# EAGLE board MOL-v2-1_MOD-Strips (EAGLE 8.2.2)
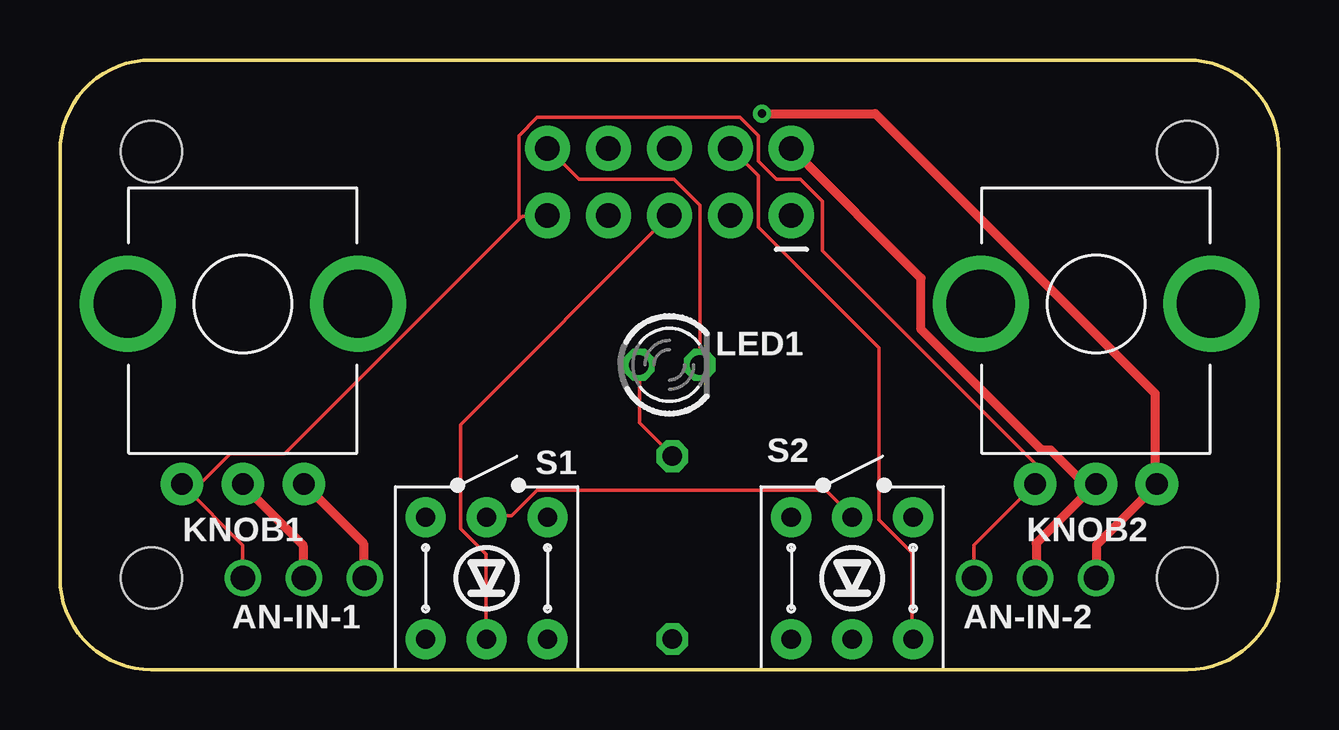
[diagram p0: board, top side]
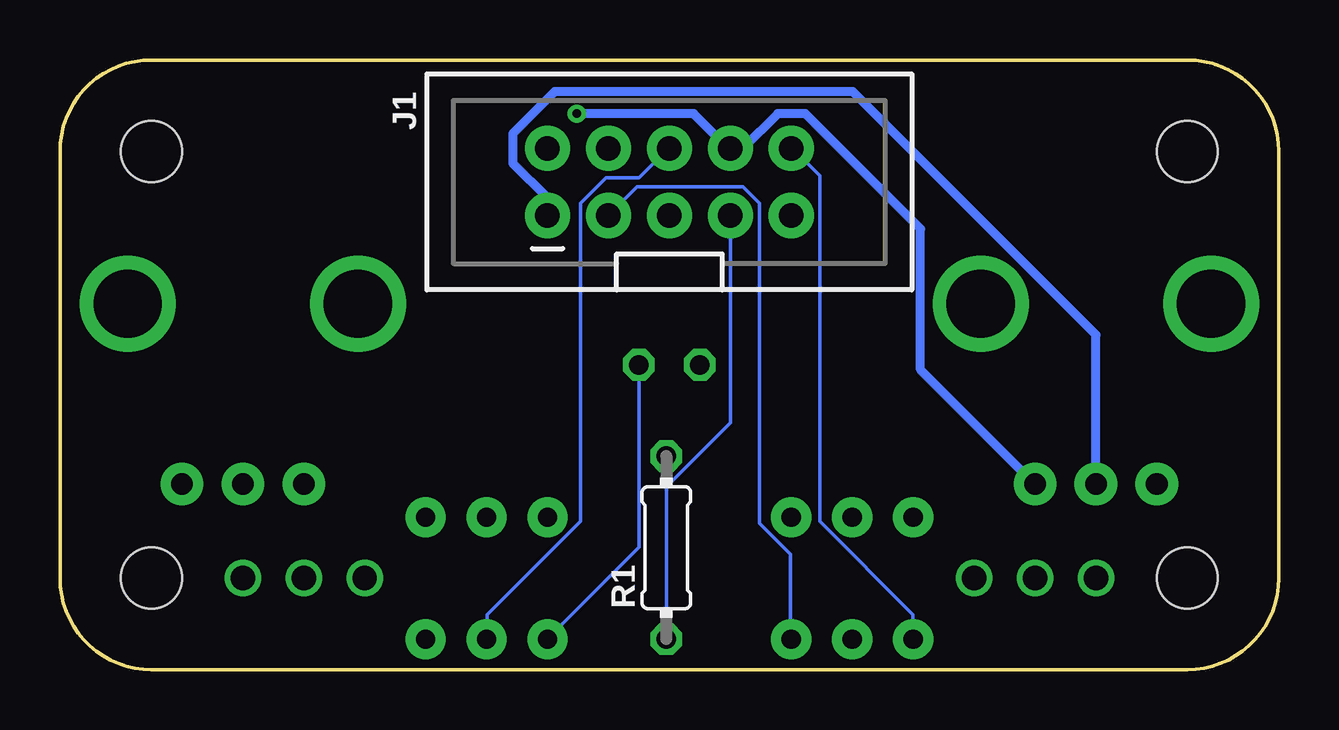
[diagram p1: board, bottom side, seen from below]

Size 50.8 x 25.4 mm. Coordinates in mm from the lower left corner, seen from the top.
Outline: 0,3.81 arc90 3.81,0 46.99,0 arc90 50.8,3.81 50.8,21.59 arc90 46.99,25.4 3.81,25.4 arc90 0,21.59 0,3.81
Copper layers (1*16): Top 0.035mm / dielectric 1.5mm / Bottom 0.035mm
Design rules "default": minimum track width 6mil, minimum drill 0.35mm, track to track 6mil, track to pad 6mil, pad to pad 6mil, via to via 6mil, smd to smd 6mil, copper to edge 40mil, drill to drill 6mil, minimum pad ring 10mil, minimum via ring 8mil, stop-mask expansion 4mil, vias tented up to drill 0mil, thermal gap 10mil
Net classes: 3 Analog Sig: width 0.381 mm, clearance 0.279 mm
Holes 2.54 mm at 3.81,3.81 46.99,3.81 3.81,21.59 46.99,21.59

## Footprints (pad centres in the part's own frame; a part is rotated, then mirrored left to right if it is on the bottom)
1X03_NO_SILK = drill 1.016 pad 1.524: 1 0,0; 2 2.54,0; 3 5.08,0
2X5-SHROUDED_LOCK = drill 1.016 pad 1.88: 1 -1.397,5.08; 2 1.397,5.08; 3 -1.397,2.54; 4 1.397,2.54; 5 -1.397,0; 6 1.397,0; 7 -1.397,-2.54; 8 1.397,-2.54; 9 -1.397,-5.08; 10 1.397,-5.08
TRIM-PCB-9MM = drill 0.9 pad 1.778: 1 -2.54,-7.5; 2 0,-7.5; 3 2.54,-7.5 | drill 2.845 pad 4: 5 -4.8,0; M2 4.8,0
LED3MM = drill 0.813 octagon: A -1.27,0; K 1.27,0
0204/7 = drill 0.813 octagon: 1 -3.81,0; 2 3.81,0
TR2-SWITCH-MOMENTARY-LED = drill 0.8 pad 1.676: 1 2.54,-2.54; 2 2.54,2.54; 3 -2.54,-2.54; 4 -2.54,2.54; A 0,2.54; C 0,-2.54

## Placement (x,y rotation side)
AN-IN-1  [1X03_NO_SILK]  7.62,3.81 0 top
AN-IN-2  [1X03_NO_SILK]  38.1,3.81 0 top
J1  [2X5-SHROUDED_LOCK]  25.4,20.32 90 bottom
KNOB1  [TRIM-PCB-9MM]  7.62,15.24 0 top
KNOB2  [TRIM-PCB-9MM]  43.18,15.24 0 top
LED1  [LED3MM]  25.4,12.7 0 top
R1  220  [0204/7]  25.53,5.08 90 bottom
S1  SW-LEDPTH  [TR2-SWITCH-MOMENTARY-LED]  17.78,3.81 0 top
S2  SW-LEDPTH  [TR2-SWITCH-MOMENTARY-LED]  33.02,3.81 0 top

## Library data of the parts
AN-IN-1 AN-IN-2 = SparkFun-Connectors
J1 = SparkFun-Connectors; PROD_ID: CONN-08671; SF_ID: PRT-08506
KNOB1 KNOB2 S1 S2 = Daniel
LED1 = led
R1 = CMU-ArtFab

## Nets
+3V3: AN-IN-1.1 AN-IN-2.1 J1.9 KNOB1.1 KNOB2.1
AGND [Analog Sig]: AN-IN-1.3 AN-IN-2.3 J1.8 KNOB1.3 KNOB2.3
AN1 [Analog Sig]: AN-IN-1.2 J1.1 KNOB1.2
AN2 [Analog Sig]: AN-IN-2.2 J1.2 KNOB2.2
B1: J1.3 S1.1
B2: J1.4 S2.1
GND: J1.10 LED1.K S1.3 S2.3
LED1: J1.7 R1.1
N1: LED1.A R1.2
PWM_1: J1.5 S1.C
PWM_2: J1.6 S2.C
V+: S1.A S2.A

## Tracks (layer width: path | path; a pad name or v marks a point on that pad's centre or on a via)
+3V3
  Top 0.152: AN-IN-2.1 38.1,5.18 40.62,7.7 KNOB2.1 40.62,7.77 40.62,8.61 31.77,17.45 31.77,19.51 30.86,20.42 29.87,20.42 29.11,21.18 29.11,22.25 28.35,23.01 19.89,23.01 19.13,22.25 19.13,18.82 19.16,18.78 | AN-IN-1.1 7.62,5.18 5.11,7.7 KNOB1.1 5.49,7.39 7.09,8.99 9.37,8.99 19.16,18.78 | 19.16,18.78 19.28,18.9 20.27,18.9 J1.9
AGND  (via drill 0.35)
  Top 0.381: AN-IN-2.3 43.2,3.81 43.2,5.18 45.72,7.7 KNOB2.3 45.64,7.92 45.64,11.51 33.98,23.16 v29.26,23.16 | AN-IN-1.3 12.65,3.81 12.65,5.26 10.21,7.7 KNOB1.3
  Bottom 0.381: KNOB1.3 10.21,7.77 14.94,12.5 14.94,18.36 19.74,23.16 20.88,23.16 22.33,21.72 J1.8 23.01,21.79 24.38,23.16 v29.26,23.16
AN1
  Top 0.381: AN-IN-1.2 10.13,3.81 10.13,5.18 7.62,7.7 KNOB1.2
  Bottom 0.381: J1.1 30.48,19.66 31.93,21.11 31.93,22.33 30.18,24.08 17.75,24.08 7.62,13.95 KNOB1.2
AN2
  Top 0.381: AN-IN-2.2 40.69,3.81 40.69,5.26 43.13,7.7 KNOB2.2 42.82,7.62 41.3,9.14 40.92,9.14 35.89,14.17 35.89,16.31 J1.2
B1
  Bottom 0.152: J1.3 26.75,20.12 22.33,20.12 21.64,19.43 21.64,6.1 20.34,4.8 20.34,1.29 S1.1
B2
  Top 0.152: S2.1 35.51,1.29 35.51,4.88 34.14,6.25 34.14,13.41 29.11,18.44 29.11,20.57 27.96,21.72 J1.4
GND
  Top 0.152: LED1.K 26.67,19.36 25.6,20.42 21.64,20.42 20.34,21.72 J1.10
  Bottom 0.152: LED1.K 26.67,5.11 30.48,1.29 S2.3 | S1.3 15.24,2.29 19.13,6.17 19.13,20.57 20.27,21.72 J1.10
LED1
  Bottom 0.152: R1.1 25.53,7.62 22.86,10.29 J1.7
N1
  Top 0.152: LED1.A 24.16,12.65 24.16,10.29 25.53,8.91 R1.2
PWM_1
  Top 0.152: J1.5 16.69,10.21 16.69,5.87 17.75,4.8 17.75,1.29 S1.C
PWM_2
  Bottom 0.152: S2.C 32.99,1.29 32.99,2.29 29.11,6.17 29.11,19.43 28.04,20.5 26.67,20.5 25.45,21.72 J1.6
V+
  Top 0.152: S1.A 17.83,6.4 18.82,6.4 19.89,7.47 31.93,7.47 32.99,6.4 S2.A